# EAGLE board OSO-MISC-21-010 Light Sensor (EAGLE 9.6.2)
REV: D
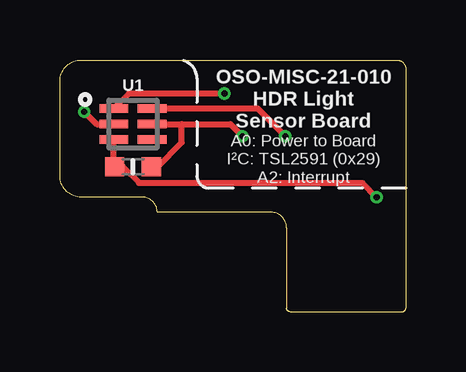
[diagram p0: board, top side]
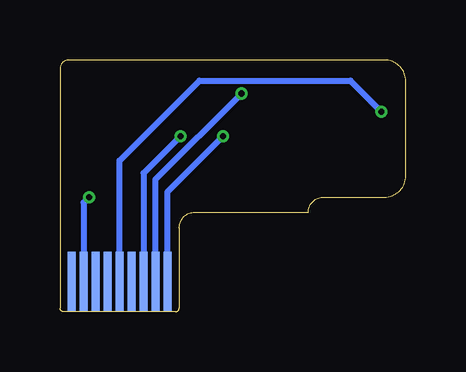
[diagram p1: board, bottom side, seen from below]

Size 14.43 x 10.48 mm. Coordinates in mm from the lower left corner, seen from the top.
Outline: 9.45,3.5 arc90 8.81,4.14 4.06,4.14 arc90 3.43,4.77 0.89,4.77 arc-90 0,5.66 0,9.6 arc-90 0.89,10.48 14.05,10.48 arc-90 14.43,10.1 14.43,3.5
Copper layers (1*16): Top 0.035559375mm / dielectric 4mil / Bottom 0.035559375mm
Design rules "oshpark-2layer *": minimum track width 6mil, minimum drill 10mil, track to track 6mil, track to pad 6mil, pad to pad 6mil, via to via 6mil, smd to smd 6mil, copper to edge 15mil, drill to drill 6mil, minimum pad ring 5mil, minimum via ring 5mil, stop-mask expansion 2.5mil, vias tented up to drill 12mil, thermal gap 10mil
Net classes: 0 default: width 0.203 mm; 1 power: width 0.203 mm; 2 gnd: width 0.203 mm

## Footprints (pad centres in the part's own frame; a part is rotated, then mirrored left to right if it is on the bottom)
_0603MP = smd 0.8 x 0.8: 1 -0.762,0; 2 0.762,0
DFN6_TAOS = smd 1.2 x 0.35: 1 -0.8,0.65; 2 -0.8,0; 3 -0.8,-0.65; 4 0.8,-0.65; 5 0.8,0; 6 0.8,0.65
FH19C9S05SH10-FFC = smd 0.347 x 2.5 bottom: 1 2,-2.25; 2 1.5,-2.25; 3 1,-2.25; 4 0.5,-2.25; 5 0,-2.25; 6 -0.5,-2.25; 7 -1,-2.25; 8 -1.5,-2.25; 9 -2,-2.25

## Placement (x,y rotation side)
C1  1uF  [_0603MP]  3.05,6.04 180 top
U1  TSL2591  [DFN6_TAOS]  3.05,7.82 0 top
U$3  FH19C-9S-0.5SH_10-FFC  [FH19C9S05SH10-FFC]  11.94,3.5 0 top

## Library data of the parts
C1 U1 = microbuilder
U$3 = FH19C-9S-0.5SH

## Nets
3.3V [power]: U$3.1
BOARD_POWER: C1.1 U1.5 U$3.9
GND [gnd]: C1.2 U1.3 U$3.2
INT: U1.2 U$3.5
SCL: U1.1 U$3.8
SDA: U1.6 U$3.7

## Tracks (layer width: path | path; a pad name or v marks a point on that pad's centre or on a via)
BOARD_POWER  (via drill 0.25)
  Top 0.254: U1.5 5.08,7.82 | 5.08,7.82 7.11,7.82 v7.62,7.31 | C1.1 4.06,6.04 5.08,7.06 5.08,7.82
  Bottom 0.254: U$3.9 9.94,4.99 v7.62,7.31
GND  (via drill 0.25)
  Top 0.254: U1.3 2.25,6.08 C1.2 2.62,6.04 3.29,5.36 12.62,5.36 v13.21,4.77
  Bottom 0.254: v13.21,4.77 13.44,4.54 U$3.2
INT  (via drill 0.25)
  Top 0.254: v1.02,8.33 1.52,7.82 U1.2
  Bottom 0.254: U$3.5 11.94,6.29 8.61,9.62 2.31,9.62 v1.02,8.33
SCL  (via drill 0.25)
  Top 0.254: v6.86,9.09 2.87,9.09 U1.1
  Bottom 0.254: U$3.8 10.44,5.51 v6.86,9.09
SDA  (via drill 0.25)
  Top 0.254: U1.6 8.24,8.47 v9.4,7.31
  Bottom 0.254: v9.4,7.31 10.94,5.77 U$3.7

## Text on the board
tPlace: OSO-MISC-21-010 / HDR Light / Sensor Board | A0: Power to Board / I²C: TSL2591 (0x29) / A2: Interrupt